# Altium PCB WWOL.PcbDoc
Units mil, origin at the board's own origin, x right, y up, seen from the top; angles counter-clockwise.
Board outline 2283.46 x 748.03 mil, 2 copper layers (Top Layer, Bottom Layer); 61 components, 50 nets, 227 pads, 14 vias.
Unrouted connection lines stored in the file: 140.
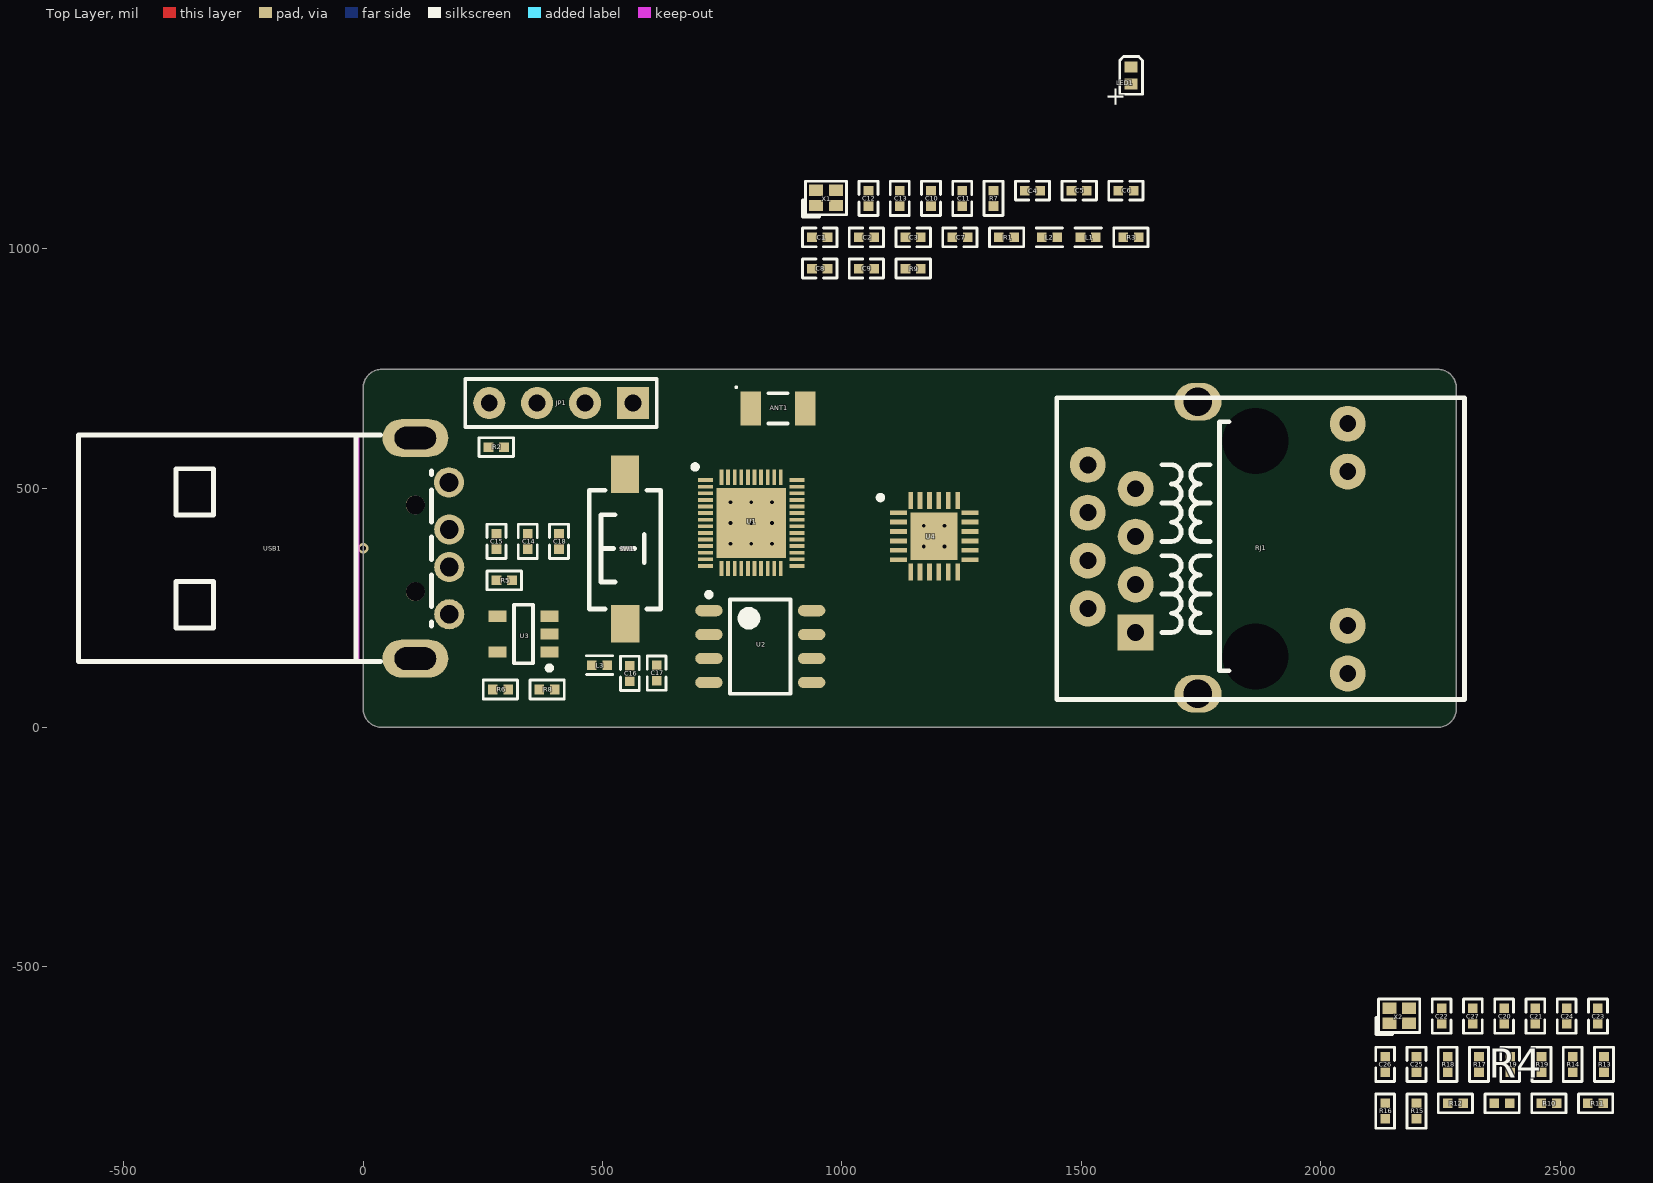
[diagram p0: Top Layer view]
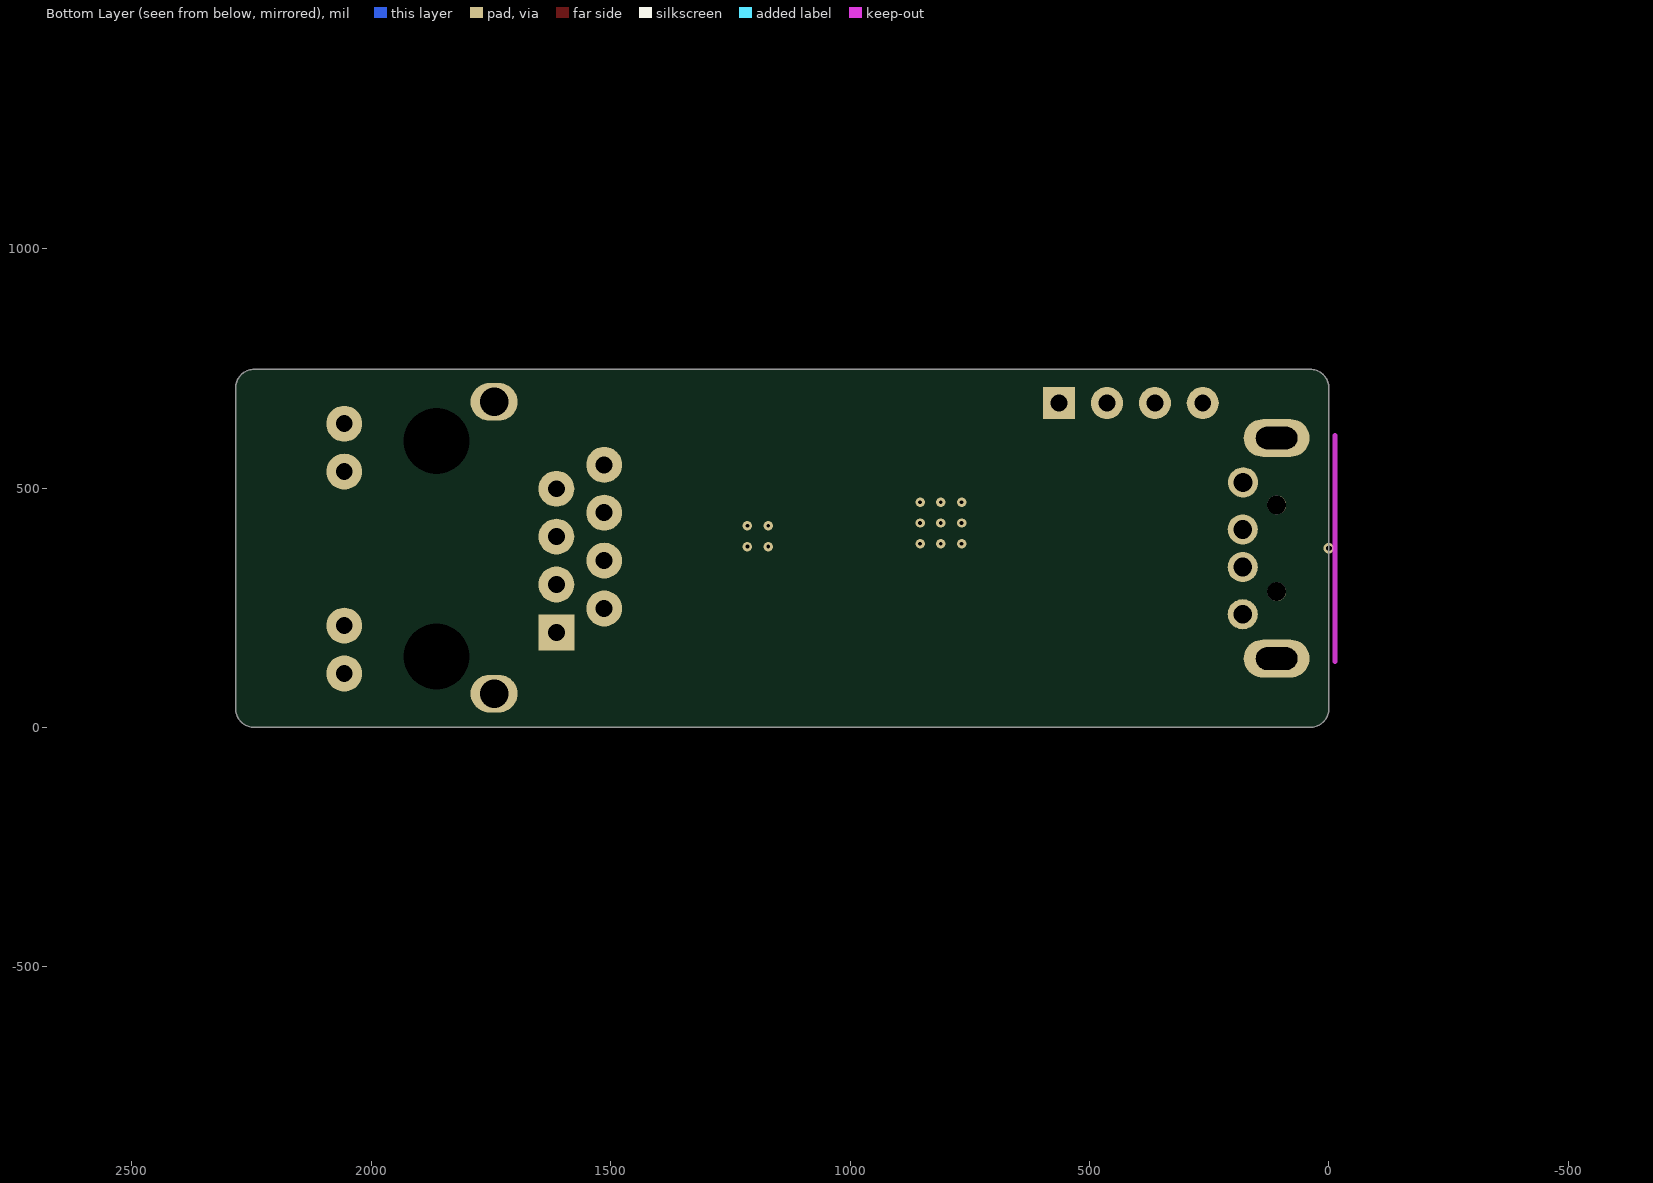
[diagram p1: Bottom Layer view, seen from below]

## Layer stack, top to bottom
Top Solder: solder mask 0.4, Solder Resist, Dk 3.5
Top Layer: signal copper 1.4
Dielectric 1: dielectric 12.6, FR-4, Dk 4.8
Bottom Layer: signal copper 1.4
Bottom Solder: solder mask 0.4, Solder Resist, Dk 3.5

## Board outline
0,39.37 0,708.66 cw(c39.37,708.66) 39.37,748.03 2244.09,748.03 cw(c2244.09,708.66) 2283.46,708.66 2283.46,39.37 cw(c2244.09,39.37) 2244.09,0 39.37,0 cw(c39.37,39.37)

## Design rules (kind name [scope] priority, off if disabled: settings)
Clearance [All] p1: gap=6 ignorepadtopadclearanceinfootprint=TRUE
PolygonConnect [All] p1: thpad.connectstyle=Relief thpad.reliefconductorwidth=20 thpad.reliefentries=4 thpad.polygonreliefangle="90 Angle" thpad.airgapwidth=10 smdpad.connectstyle=Relief smdpad.reliefconductorwidth=20 smdpad.reliefentries=4 smdpad.polygonreliefangle="90 Angle" smdpad.airgapwidth=10 via.connectstyle=Direct via.reliefconductorwidth=10 via.reliefentries=4 via.polygonreliefangle="90 Angle" via.airgapwidth=10
RoutingVias [All] p1: holewidth=12 width=22 viastyle="Through Hole" minholewidth=12 minwidth=22 maxholewidth=12 maxwidth=22
SilkToSilkClearance [All] p1: silktosilkclearance=2
SilkToSolderMaskClearance [IsPad] p1: minsilkscreentomaskgap=2 clearancetoexposedcopper=TRUE
SolderMaskExpansion [All] p1: expansion=2.5 istentingtop=FALSE
Width [All] p1: maxlimit=6 minlimit=6 preferedwidth=6
28 further rules are at their usual default settings.

## Classes and differential pairs
net class RJ45: LINK_LED RXN RXP SPEED_LED TXN TXP
net class PHY: MDC MDIO REF_CLK_50M Reset_N RXD0 RXD1 TX_EN TXD0 TXD1
net class PWR: GND VDD33 VDD_SDIO VIN_5V
component class WWOL_phy: C19 C20 C21 C22 C23 C24 C25 C26 C27 R10 R12 R14 R18 R19 RJ1 U4 X2
component class WWOL_main: ANT1 C1 C2 C3 C4 C5 C6 C7 C8 C9 C10 C11 C12 C13 C14 C15 C16 C17 C18 JP1 L1 L2 L3 LED1 R1 R2 R3 R5 R6 R10 SW1 U1 U2 U3 USB1 X1

## Components (designator, comment, footprint, x,y, rotation, side; value= is the part's Value field where it differs from the comment)
ANT1 "KH-3216-A35" ANT-SMD-2_L3.2-W1.6-C504002 866.5,666.5 r0 top
C1 "100pF/16V(10%)" C0402 953.78,1023.65 r0 top
C2 "1uF/16V(10%)" C0402 1051.34,1023.65 r0 top
C3 "10pF/50V(5%)" C0402 1148.9,1023.65 r0 top
C4 "10pF/50V(5%)" C0402 1398.05,1121.2 r0 top
C5 "0.1uF/16V(10%)" C0402 1495.61,1121.2 r0 top
C6 "10uF/16V(20%)" C0402 1593.16,1121.2 r0 top
C7 "1uF/16V(10%)" C0402 1246.46,1023.65 r0 top
C8 "0.1uF/16V(10%)" C0402 953.78,958.37 r0 top
C9 "0.1uF/16V(10%)" C0402 1051.34,958.37 r0 top
C10 "" C0402 1186.08,1105.06 r90 top
C11 "" C0402 1251.35,1105.06 r90 top
C12 "1uF/16V(10%)" C0402 1055.53,1105.06 r90 top
C13 "1uF/16V(10%)" C0402 1120.8,1105.06 r90 top
C14 "10uF/16V(20%)" C0402 343.91,388.72 r90 top
C15 "0.1uF/16V(10%)" C0402 278.64,388.72 r90 top
C16 "0.1uF/16V(10%)" C0402 557,113 r90 top
C17 "22uF/10V(20%)" C0402 613,113.5 r90 top
C18 "0.1uF/16V(10%)" C0402 409.19,388.72 r90 top
C19 "0.1uF/16V(10%)" C0402 2395.74,-703.67 r90 top
C20 "0.1uF/16V(10%)" C0402 2383.08,-602.78 r90 top
C21 "0.1uF/16V(10%)" C0402 2448.35,-602.78 r90 top
C22 "20pF/50V(5%)" C0402 2252.53,-602.78 r90 top
C23 "20pF/50V(5%)" C0402 2578.91,-602.78 r90 top
C24 "10uF/16V(20%)" C0402 2513.63,-602.78 r90 top
C25 "0.1uF/16V(10%)" C0402 2199.91,-703.67 r90 top
C26 "0.1uF/16V(10%)" C0402 2134.64,-703.67 r90 top
C27 "0.1uF/16V(10%)" C0402 2317.8,-602.78 r90 top
JP1 "HDR-1X4" HDR2.54-LI-4P 413.5,677.5 r180 top
L1 "2nH,700mA" L0402 1514.33,1023.65 r0 top
L2 "1.8nH,500mA" L0402 1433.31,1023.65 r0 top
L3 "0.47uH,30%,4.27A" L0402 494,130 r180 top
LED1 "绿色" "LED 0402G" 1604.04,1361.68 r90 top
R1 "470R(5%)" R0402 1344.02,1023.65 r0 top
R2 "470R(5%)" R0402 278.14,585.5 r0 top
R3 "10K(1%)" R0402 1603.62,1023.65 r0 top
R4 "470R(5%)" R0402 2378.89,-785.09 r0 top
R5 "100K(1%)" R0402 294.78,307.3 r0 top
R6 "200K(1%)" R0402 286.83,79.19 r0 top
R7 "470R(5%)" R0402 1316.63,1105.06 r90 top
R8 "44.2K(1%)" R0402 384.39,79.19 r0 top
R9 "470R(5%)" R0402 1148.9,958.37 r0 top
R10 "49R9(5%)" R0402 2476.45,-785.09 r0 top
R11 "49R9(5%)" R0402 2574.01,-785.09 r0 top
R12 "49R9(5%)" R0402 2281.33,-785.09 r0 top
R13 "49R9(5%)" R0402 2591.57,-703.67 r90 top
R14 "470R(5%)" R0402 2526.29,-703.67 r90 top
R15 "470R(5%)" R0402 2199.91,-801.23 r90 top
R16 "12.1K(1%)" R0402 2134.64,-801.23 r90 top
R17 "10K(5%)" R0402 2330.46,-703.67 r90 top
R18 "10K(5%)" R0402 2265.19,-703.67 r90 top
R19 "10K(5%)" R0402 2461.02,-703.67 r90 top
RJ1 "HR911105A" RJ-45A12 1863.5,373.5 r90 top
SW1 "TSW SMD-3*6*2.5" "TSW SMD-3*6*2.5" 547,374 r90 top
U1 "ESP32-D0WD-V3" QFN35P500X500X90_HS-49N 810.5,427 r0 top
U2 "XT25F32BSOIGU-S" SOP127P600X175-8N 829.5,169 r0 top
U3 "MT3102NSBR" SOT95P280X145-5N 335,195 r180 top
U4 "LAN8720A-CP-TR" QFN50P400X400X100_HS-25N 1192.7,399.34 r0 top
USB1 "USB_A/P_A" USB_A/P_A 144.57,374.13 r270 top locked
X1 "40MHZ±10PPM10PF" SMD1612-4P 966.94,1105.89 r0 top
X2 "25MHZ±10PPM20PF" SMD1612-4P 2163.94,-601.95 r0 top

## Footprints (in the part's own frame and the unit in brackets; to place one, negate y for a bottom-side part, rotate by r counter-clockwise, add the part's x,y. Pads: shape width x height; smd on the part's side, far side on the other; paste and mask are expansions set on the pad)
ANT-SMD-2_L3.2-W1.6-C504002 [mm]
  rect 1.1x1.8 smd: 1(-1.45,0) 2(1.45,0)
  silkscreen extent -2.26,-0.8 0.5,1.16, body extent -1.6,-0.9 1.6,0.9, height 1.2
C0402 [mm]
  rect 0.51x0.51 smd: 1(-0.41,0) 2(0.41,0)
  silkscreen extent -0.91,-0.5 0.91,0.5, body extent -0.5,-0.26 0.5,0.26, height 0.53
HDR2.54-LI-4P [mm] "排针，4脚"
  rect 1.7x1.7 hole 0.9: 1(-3.81,0)
  round 1.7 hole 0.9: 2(-1.27,0) 3(1.27,0) 4(3.81,0)
  silkscreen extent -5.08,-1.27 5.08,1.27, body extent -5.08,-1.27 5.08,1.27, height 8.5
L0402 [mm]
  rect 0.51x0.51 smd: 1(-0.41,0) 2(0.41,0)
  silkscreen extent -0.7,-0.5 0.7,0.5, body extent -0.5,-0.25 0.5,0.25, height 0.5
"LED 0402G" [mm]
  rect 0.6x0.7 smd: 1(0.45,0) 2(-0.45,0)
  silkscreen extent -1,-0.6 1,0.6, body extent -0.8,-0.4 0.8,0.4, height 0.47
QFN35P500X500X90_HS-49N [mm] "QFN, 48-Leads, Body 5.00x5.00mm, Pitch 0.35mm, Thermal Pad 3.70x3.70mm, IPC Medium Density"
  rect 0.8x0.2 smd mask+0.05: 1(-2.425,2.275) 2(-2.425,1.925) 3(-2.425,1.575) 4(-2.425,1.225) 5(-2.425,0.875) 6(-2.425,0.525) 7(-2.425,0.175) 8(-2.425,-0.175) 9(-2.425,-0.525) 10(-2.425,-0.875) 11(-2.425,-1.225) 12(-2.425,-1.575) 13(-2.425,-1.925) 14(-2.425,-2.275) 25(2.425,-2.275) 26(2.425,-1.925) 27(2.425,-1.575) 28(2.425,-1.225) 29(2.425,-0.875) 30(2.425,-0.525) 31(2.425,-0.175) 32(2.425,0.175) 33(2.425,0.525) 34(2.425,0.875) 35(2.425,1.225) 36(2.425,1.575) 37(2.425,1.925) 38(2.425,2.275)
  rect 0.2x0.8 smd mask+0.05: 15(-1.575,-2.425) 16(-1.225,-2.425) 17(-0.875,-2.425) 18(-0.525,-2.425) 19(-0.175,-2.425) 20(0.175,-2.425) 21(0.525,-2.425) 22(0.875,-2.425) 23(1.225,-2.425) 24(1.575,-2.425) 39(1.575,2.425) 40(1.225,2.425) 41(0.875,2.425) 42(0.525,2.425) 43(0.175,2.425) 44(-0.175,2.425) 45(-0.525,2.425) 46(-0.875,2.425) 47(-1.225,2.425) 48(-1.575,2.425)
  rect 3.7x3.7 smd mask+0.05: 49(0,0)
  silkscreen extent -3.1,2.85 -2.85,3.1, body extent -2.52,-2.53 2.53,2.52, height 0.9
QFN50P400X400X100_HS-25N [mm] "QFN, 24-Leads, Body 4.00x4.00mm, Pitch 0.50mm, Thermal Pad 2.50x2.50mm, IPC Medium Density"
  rect 0.9x0.25 smd mask+0.05: 1(-1.9,1.25) 2(-1.9,0.75) 3(-1.9,0.25) 4(-1.9,-0.25) 5(-1.9,-0.75) 6(-1.9,-1.25) 13(1.9,-1.25) 14(1.9,-0.75) 15(1.9,-0.25) 16(1.9,0.25) 17(1.9,0.75) 18(1.9,1.25)
  rect 0.25x0.9 smd mask+0.05: 7(-1.25,-1.9) 8(-0.75,-1.9) 9(-0.25,-1.9) 10(0.25,-1.9) 11(0.75,-1.9) 12(1.25,-1.9) 19(1.25,1.9) 20(0.75,1.9) 21(0.25,1.9) 22(-0.25,1.9) 23(-0.75,1.9) 24(-1.25,1.9)
  rect 2.5x2.5 smd mask+0.05: 25(0,0)
  silkscreen extent -2.97,1.93 -2.72,2.17, body extent -2.05,-2.05 2.05,2.05, height 1
R0402 [mm]
  rect 0.51x0.51 smd: 1(-0.41,0) 2(0.41,0)
  silkscreen extent -0.91,-0.5 0.91,0.5, body extent -0.5,-0.25 0.5,0.25, height 0.3
RJ-45A12 [mm] "网线接口"
  oval 2x2.5 hole 1.5: 0(-7.695,3.05) 0(7.785,3.05)
  round 3.302 hole 3.5: 0(-5.715,0) 0(5.715,0)
  rect 1.905x1.905 hole 0.9: 1(-4.445,6.35)
  round 1.905 hole 0.9: 2(-3.175,8.89) 3(-1.905,6.35) 4(-0.635,8.89) 5(0.635,6.35) 6(1.905,8.89) 7(3.175,6.35) 8(4.445,8.89) 9(-6.625,-4.9) 10(-4.085,-4.9) 11(4.085,-4.9) 12(6.625,-4.9)
  silkscreen extent -8,-11.1 8,10.54, body extent -7.97,-10.93 7.91,10.47, height 1.5
SMD1612-4P [mm] "1.6*1.2*0.35mm（长宽高）"
  rect 0.75x0.6 smd mask+0.05: 1(-0.525,-0.4) 2(0.525,-0.4) 3(0.525,0.4) 4(-0.525,0.4)
  silkscreen extent -1.22,-0.99 1.09,0.89, body extent -0.8,-0.6 0.8,0.6, height 0.35
SOP127P600X175-8N [mm] "SOP, 8-Leads, Body 4.85x3.90mm, Pitch 1.27mm, IPC Medium Density"
  oval 1.45x0.6 smd: 1(-2.725,1.905) 2(-2.725,0.635) 3(-2.725,-0.635) 4(-2.725,-1.905) 5(2.725,-1.905) 6(2.725,-0.635) 7(2.725,0.635) 8(2.725,1.905)
  silkscreen extent -2.85,-2.5 1.6,2.88, body extent -2,-2.5 2,2.5, height 1.75
SOT95P280X145-5N [mm] "SOT23, 5-Leads, Body 2.90x2.80mm, Pitch 0.95mm, IPC Medium Density"
  rect 0.95x0.6 smd: 1(-1.375,0.95) 2(-1.375,0) 3(-1.375,-0.95) 4(1.375,-0.95) 5(1.375,0.95)
  silkscreen extent -1.5,-1.55 0.5,1.92, body extent -0.9,-1.55 0.9,1.55, height 1.45
"TSW SMD-3*6*2.5" [mm] "3*6*2.5mm"
  rect 2x1.5 smd: 1(-3.996,-0.02) 2(3.937,0)
  silkscreen extent -3.21,-1.9 3.09,1.9, body extent -4,-1.88 4,1.62, height 2.59
USB_A/P_A [mm] "精拓金 917-181A102ED60200"
  round 1.6 hole 1: 1(3.5,0.9) 2(1,0.9) 3(-1,0.9) 4(-3.5,0.877)
  oval 2x3.5 hole 1.2 slot 2.2 at 90 deg: MH1(5.85,-0.9) MH2(-5.85,-0.9)
  round 1 hole 1 unplated: ""(-2.3,-0.9) ""(2.3,-0.9)
  Keep-Out Layer lines w0.254: 6,-4 -6,-4
  silkscreen extent -6.01,-18.76 6.01,-0.05, body extent -6.52,-18.8 6.42,1.2, height 3.25

## Part data
ANT1: "金航标 KH-3216-A35", BOM_JLCPCB Part Class="Extended Part", BOM_Manufacturer=kinghelm(金航标), BOM_Manufacturer Part=KH-3216-A35, BOM_Supplier=LCSC, BOM_Supplier Part=C504002, Contributor=LCSC, spicePre=L, spiceSymbolName=KH-3216-A35
C1 C2 C3 C4 C5 C6 C7 C8 C9 C10 C11 C12 C13 C14 C15 C16 C17 C18 C19 C20 C21 C22 C23 C24 C25 C26 C27: library part C, "无极性贴片电容", BOM名称=无极性贴片电容, 学习资源=www.ooocke.com, 版权归属=源创客
JP1: library part "Header 4", "4P接插件", BOM名称=4P接插件, 学习资源=www.ooocke.com, 版权归属=源创客
L1 L2 L3: library part L, "小功率贴片电感"
LED1: library part LED-SMD, "贴片LED", BOM名称=贴片LED, 学习资源=www.ooocke.com, 版权归属=源创客
R1 R2 R3 R4 R5 R6 R7 R8 R9 R10 R11 R12 R13 R14 R15 R16 R17 R18 R19: library part R, "贴片电阻"
RJ1: "带灯以太网接口"
SW1: library part "TSW 3x6", "3x6轻触开关", BOM名称=3x6轻触开关, 学习资源=www.ooocke.com, 版权归属=源创客
U1: BOM_JLCPCB Part Class="Extended Part", BOM_Manufacturer="ESPRESSIF 乐鑫", Frequency=-, BOM_Manufacturer Part=ESP32-D0WD-V3, BOM_Supplier=LCSC, BOM_Supplier Part=C967021, Contributor=LCSC, spicePre=U, spiceSymbolName=ESP32-D0WD-V3
U2: "spi flash", BOM_JLCPCB Part Class="Extended Part", BOM_Manufacturer=XTX, BOM_Manufacturer Part=XT25F32BSOIGU-S, BOM_Supplier=LCSC, BOM_Supplier Part=C558851, Contributor=LCSC, spicePre=U, spiceSymbolName=XT25F32BSOIGU-S
U3: "开关电源"
U4: "以太网phy"
USB1: "精拓金 917-181A102ED60200", BOM_JLCPCB Part Class="Extended Part", BOM_Manufacturer=SOFNG, BOM_Manufacturer Part=USB-07, BOM_Supplier=LCSC, BOM_Supplier Part=C183610, Contributor=LCSC, spicePre=U, spiceSymbolName=USB-07
X1 X2: library part XTAL-4P, "无源晶振"

## Via types
v1: diameter 19.68, hole 7.87, Top Layer to Bottom Layer, 13 vias
v2: diameter 22, hole 12, Top Layer to Bottom Layer, tented both sides, 1 vias

## Nets (pads, with @x,y where several pads share a name; then routed paths per layer and width w, separated by ;. In a path a pad name is that pad's centre, name@x,y a point inside that pad or via, vN(x,y) a via of type N, cw(c..) or ccw(c..) an arc to the next point about the centre after c; other vN are vias at no path point)
CRS_DV: U1.16 U4.11
GND: C1.1 C2.1 C3.1 C4.1 C5.1 C6.1 C7.1 C8.1 C9.1 C10.1 C11.1 C12.1 C13.1 C14.1 C15.1 C16.1 C17.1 C18.1 C19.2 C20.2 C21.1 C22.1 C23.1 C24.1 C25.1 C26.1 C27.1 JP1.3 LED1.2 R4.1 R8.1 R16.2 R17.1 R18.1 R19.1 RJ1.10 U2.4 U3.2 U4.25 USB1.4 X1.2 X1.4 X2.2 X2.4
  other v1: 1171.04,377.69 1214.35,377.69 1171.04,421 1214.35,421
GPIO0: R2.2 R9.2 U1.23
LINK_LED: R14.2 R17.2 U4.3
MDC: U1.36 U4.13
MDIO: U1.35 U4.12
NetANT1_1: ANT1.1 C10.2 L2.2
NetC3_2: C3.2 U1.44 X1.3
NetC4_2: C4.2 U1.45 X1.1
NetC11_2: C11.2 L2.1 U1.2
NetC12_2: C12.2 R3.1 U1.9
NetC18_2: C18.2 R5.1 U3.1
NetC22_2: C22.2 U4.4 X2.3
NetC23_2: C23.2 U4.5 X2.1
NetC24_2: C24.2 C25.2 U4.6
NetJP1_4: JP1.4 R2.1
NetL1_1: L1.1 U1.3 U1.4
NetL3_1: L3.1 U3.3
NetLED1_1: LED1.1 R7.1
NetR1_2: R1.2 U1.41
NetR4_2: R4.2 SW1.2
NetR6_1: R6.1 R8.2 U3.5
NetR7_2: R7.2 U1.22
NetR14_1: R14.1 RJ1.9
NetR15_1: R15.1 RJ1.11
NetR16_1: R16.1 U4.24
NetSW1_1: SW1.1 U1.24
REF_CLK_50M: R9.1 U4.14
Reset_N: C26.2 R19.2 U1.34 U4.15
RXD0: U1.14 U4.8
RXD1: U1.15 U4.7
RXN: R10.2 RJ1.6 U4.22
RXP: R11.2 U4.23
SCK/CLK: U1.31 U2.6
SCS/CMD: U1.30 U2.1
SDI/SD1: U1.33 U2.5
SDO/SD0: U1.32 U2.2
SHD/SD2: U1.28 U2.7
SPEED_LED: R15.2 R18.2 U4.2
SWP/SD3: U1.29 U2.3
TX_EN: U1.42 U4.16
TXD0: U1.38 U4.17
TXD1: U1.39 U4.18
TXN: R12.2 RJ1.2 U4.20
TXP: R13.2 RJ1.1 U4.21
U0RXD: JP1.2 U1.40
U0TXD: JP1.1 R1.1
VDD33: C1.2 C2.2 C5.2 C6.2 C7.2 C8.2 C9.2 C16.2 C17.2 C19.1 C20.1 C27.2 L1.2 L3.2 R3.2 R6.2 R10.1 R11.1 R12.1 R13.1 U1.1 U1.37 U1.43 U1.46 U4.1 U4.9 U4.19
VDD_SDIO: C13.2 U1.26 U2.8
VIN_5V: C14.2 C15.2 R5.2 U3.4 USB1.1
pads on no net: ANT1.2 C21.2 RJ1.0 RJ1.3 RJ1.4 RJ1.5 RJ1.7 RJ1.8 RJ1.12 U1.5 U1.6 U1.7 U1.8 U1.10 U1.11 U1.12 U1.13 U1.17 U1.18 U1.19 U1.20 U1.21 U1.25 U1.27 U1.47 U1.48 U1.49 U4.10 USB1. USB1.2 USB1.3 USB1.MH1 USB1.MH2
copper on no net:
  other v1: 767.19,383.69 810.5,383.69 853.81,383.69 767.19,427 810.5,427 853.81,427 767.19,470.31 810.5,470.31 853.81,470.31
  other v2: 0,374.02

## Silkscreen, mask and mechanical layers (free items; w line width, h text height)
Mechanical 1:
  lines w10: -7.5,369.02 2275.96,369.02 ; 0,39.37 ccw(c39.37,39.37) 39.37,0 2244.09,0 ccw(c2244.09,39.37) 2283.46,39.37 2283.46,708.66 ccw(c2244.09,708.66) 2244.09,748.03 39.37,748.03 ccw(c39.37,708.66) 0,708.66 0,39.37

## Text inside footprints (layer, text, board x,y; h text height)
LED1: Top Overlay "+" at 1588.29,1294.35 h40 r90